# Altium PCB Motor Controller.PcbDoc (part 1 of 2)
Units mil, origin at the board's own origin, x right, y up, seen from the top; angles counter-clockwise.
Board outline 2165.35 x 2283.46 mil, 2 copper layers (Top Layer, Bottom Layer); 50 components, 51 nets, 203 pads, 72 vias.
Unrouted connection lines stored in the file: 35.
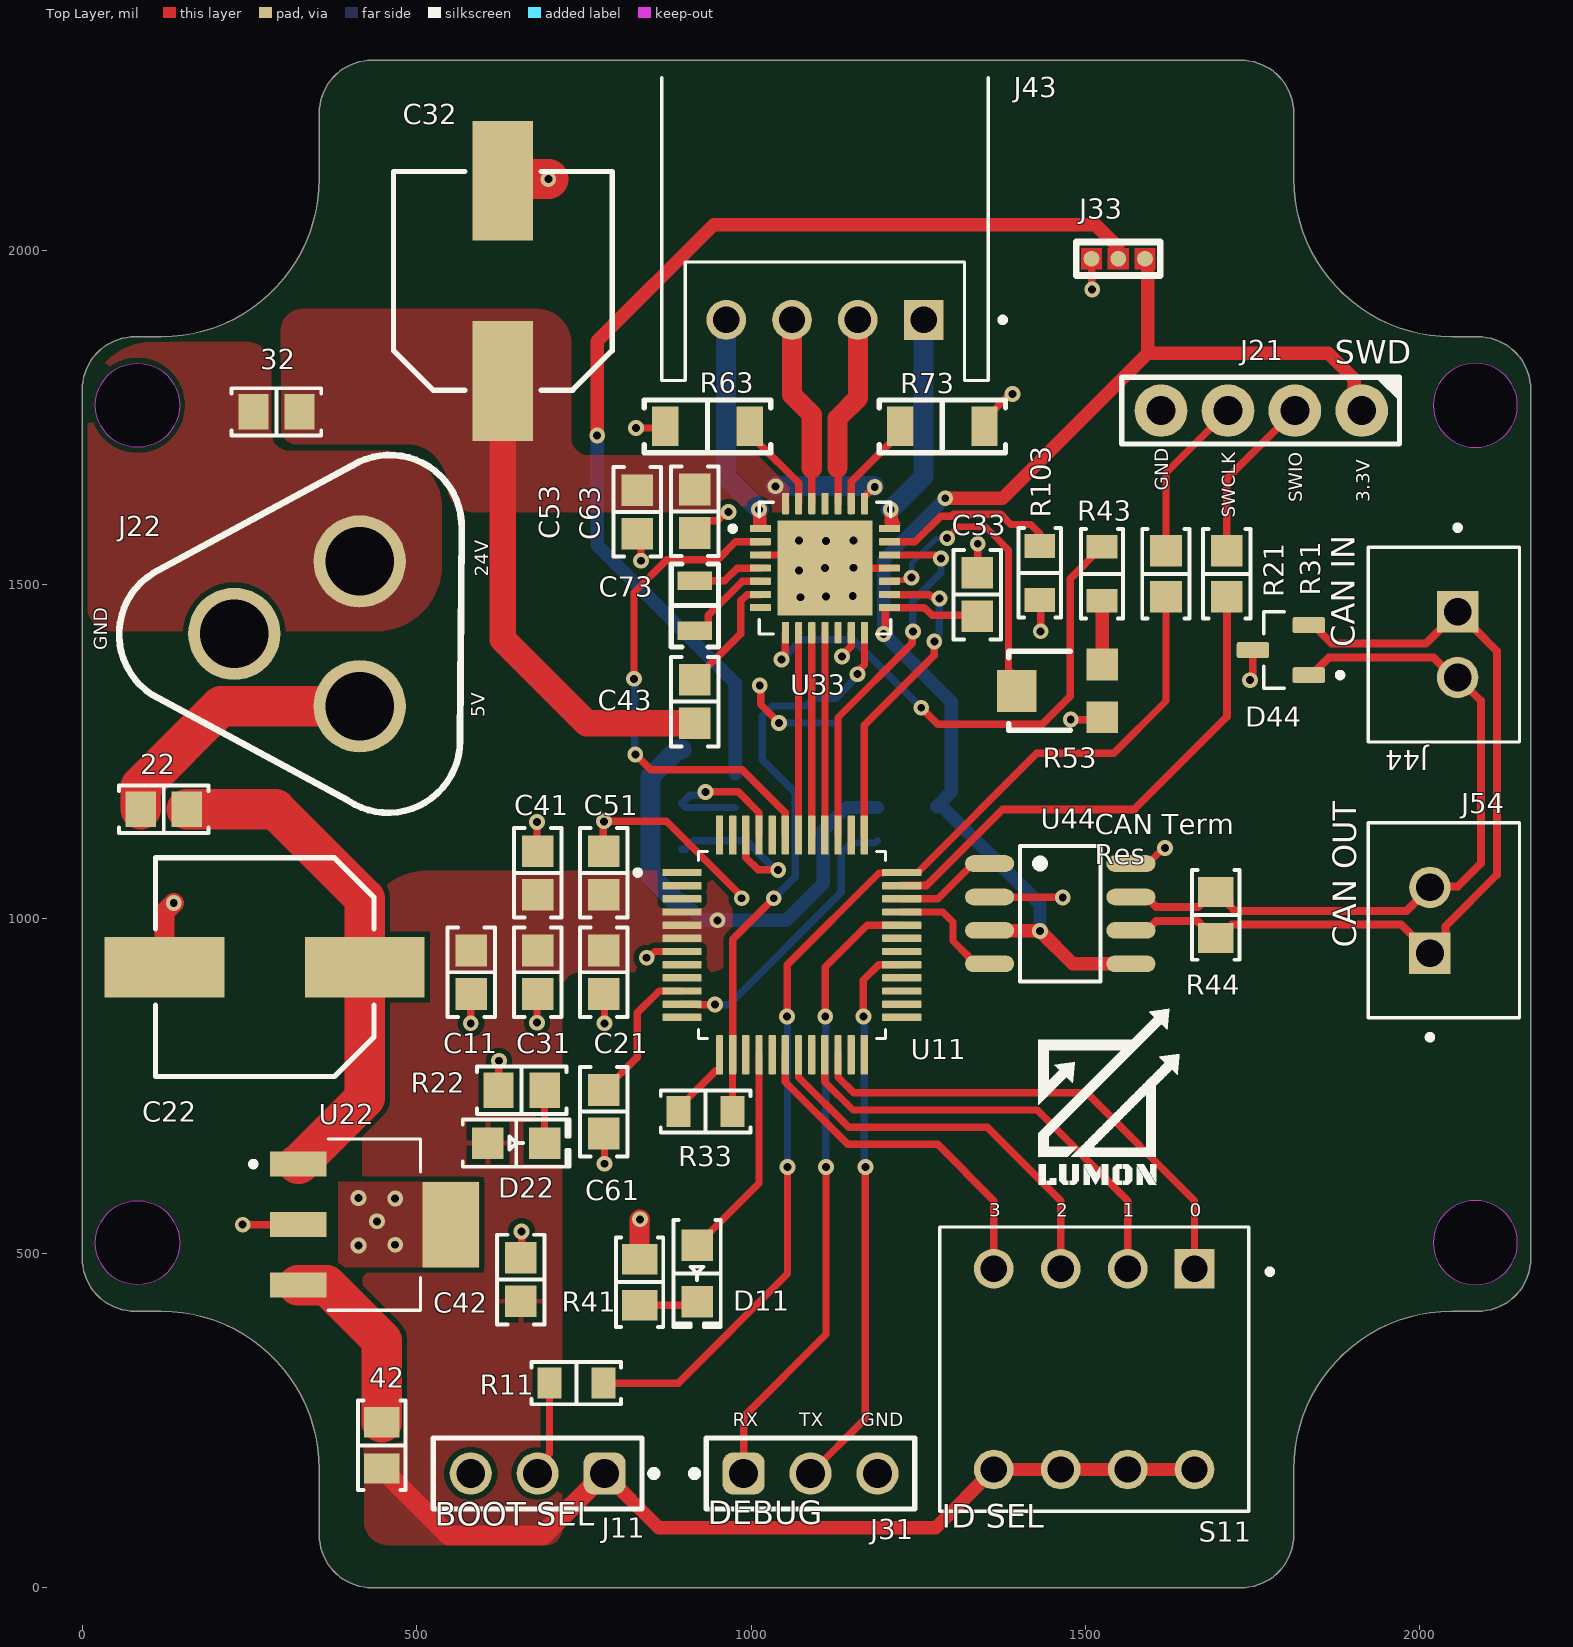
[diagram p0: Top Layer view]
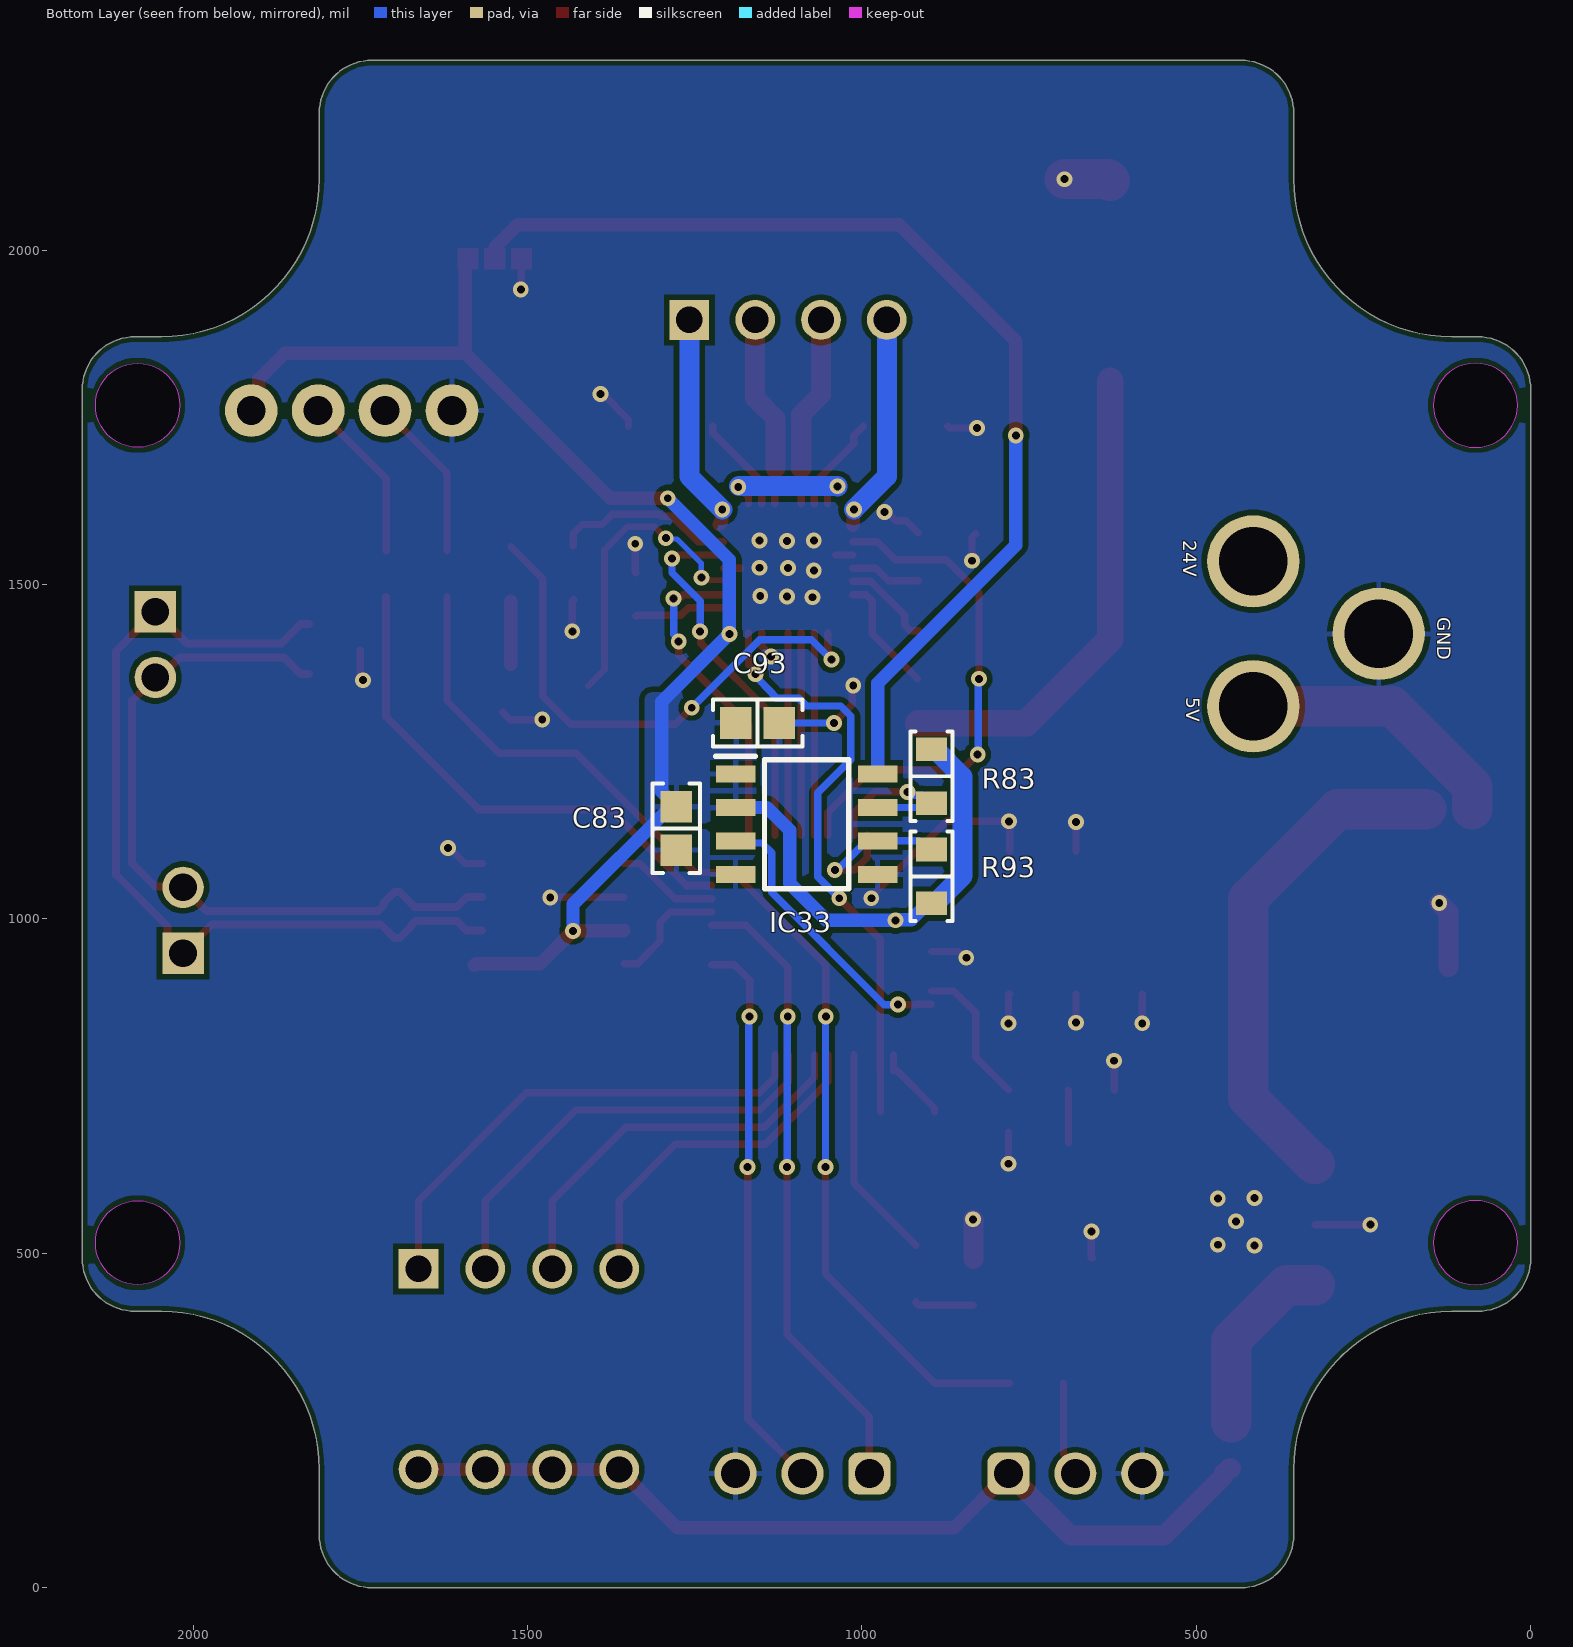
[diagram p1: Bottom Layer view, seen from below]
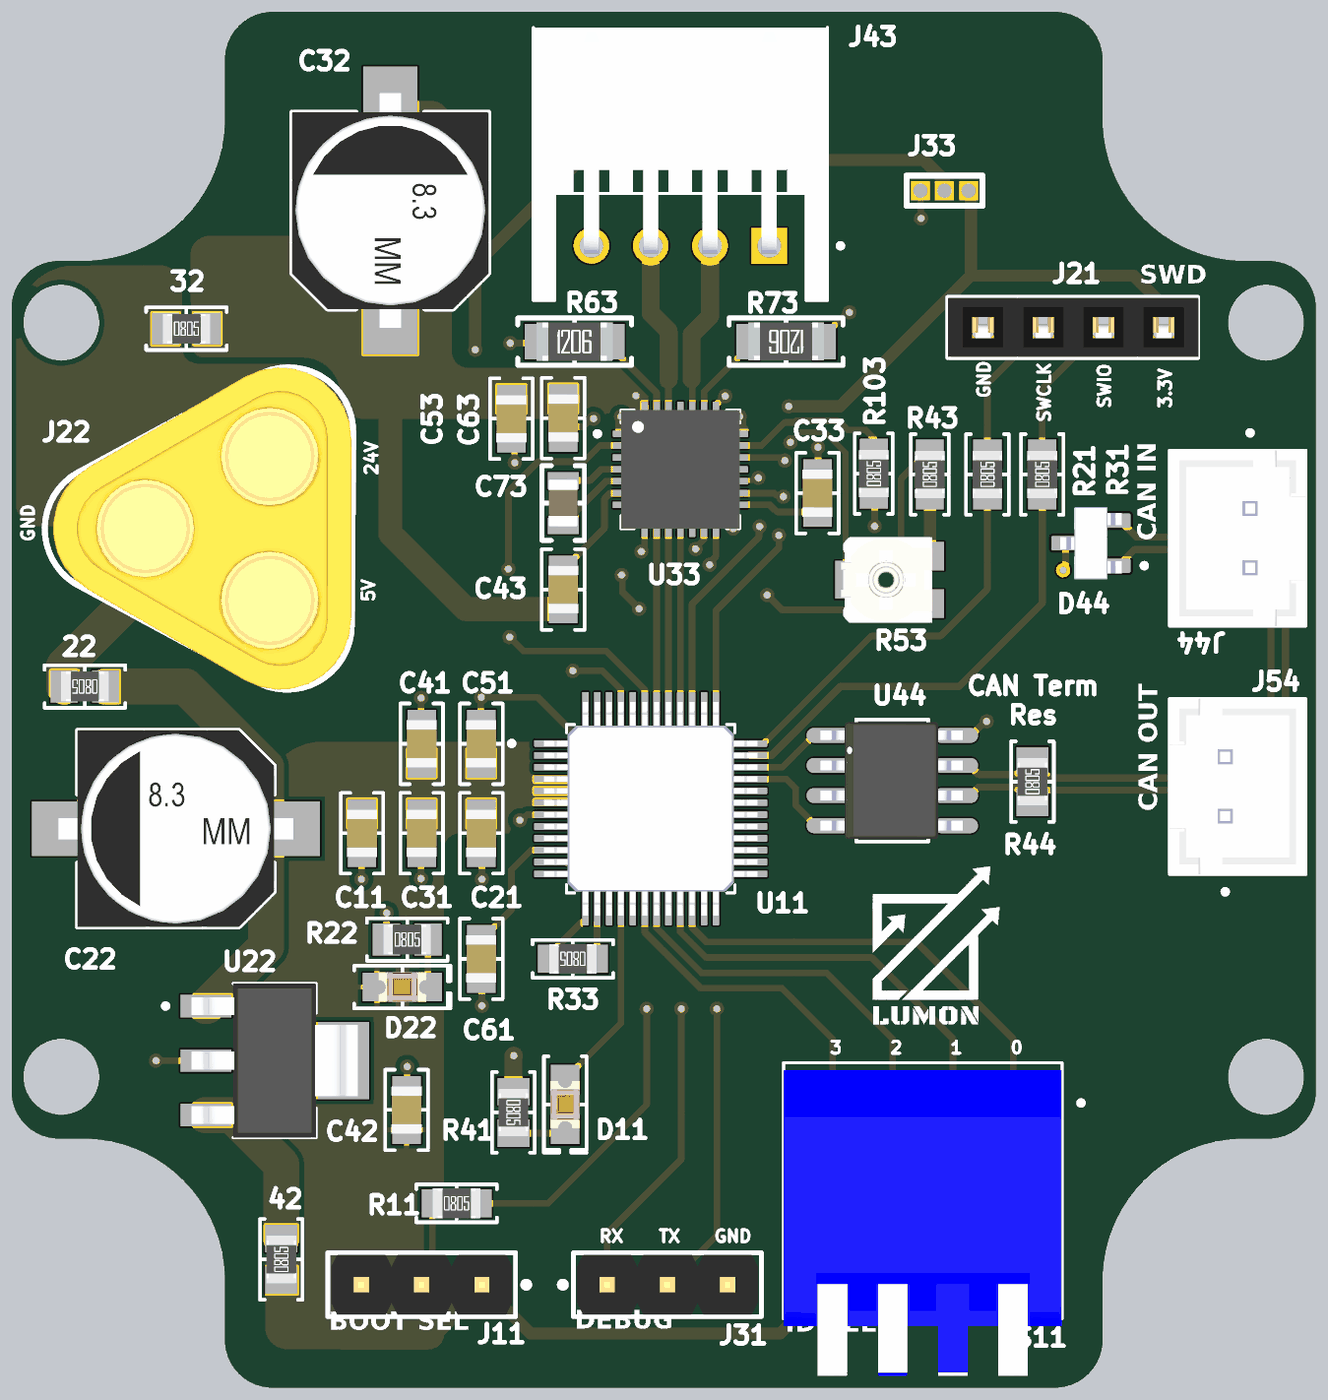
[diagram p2: 3D render of the assembled board from above, using the file's embedded part models]
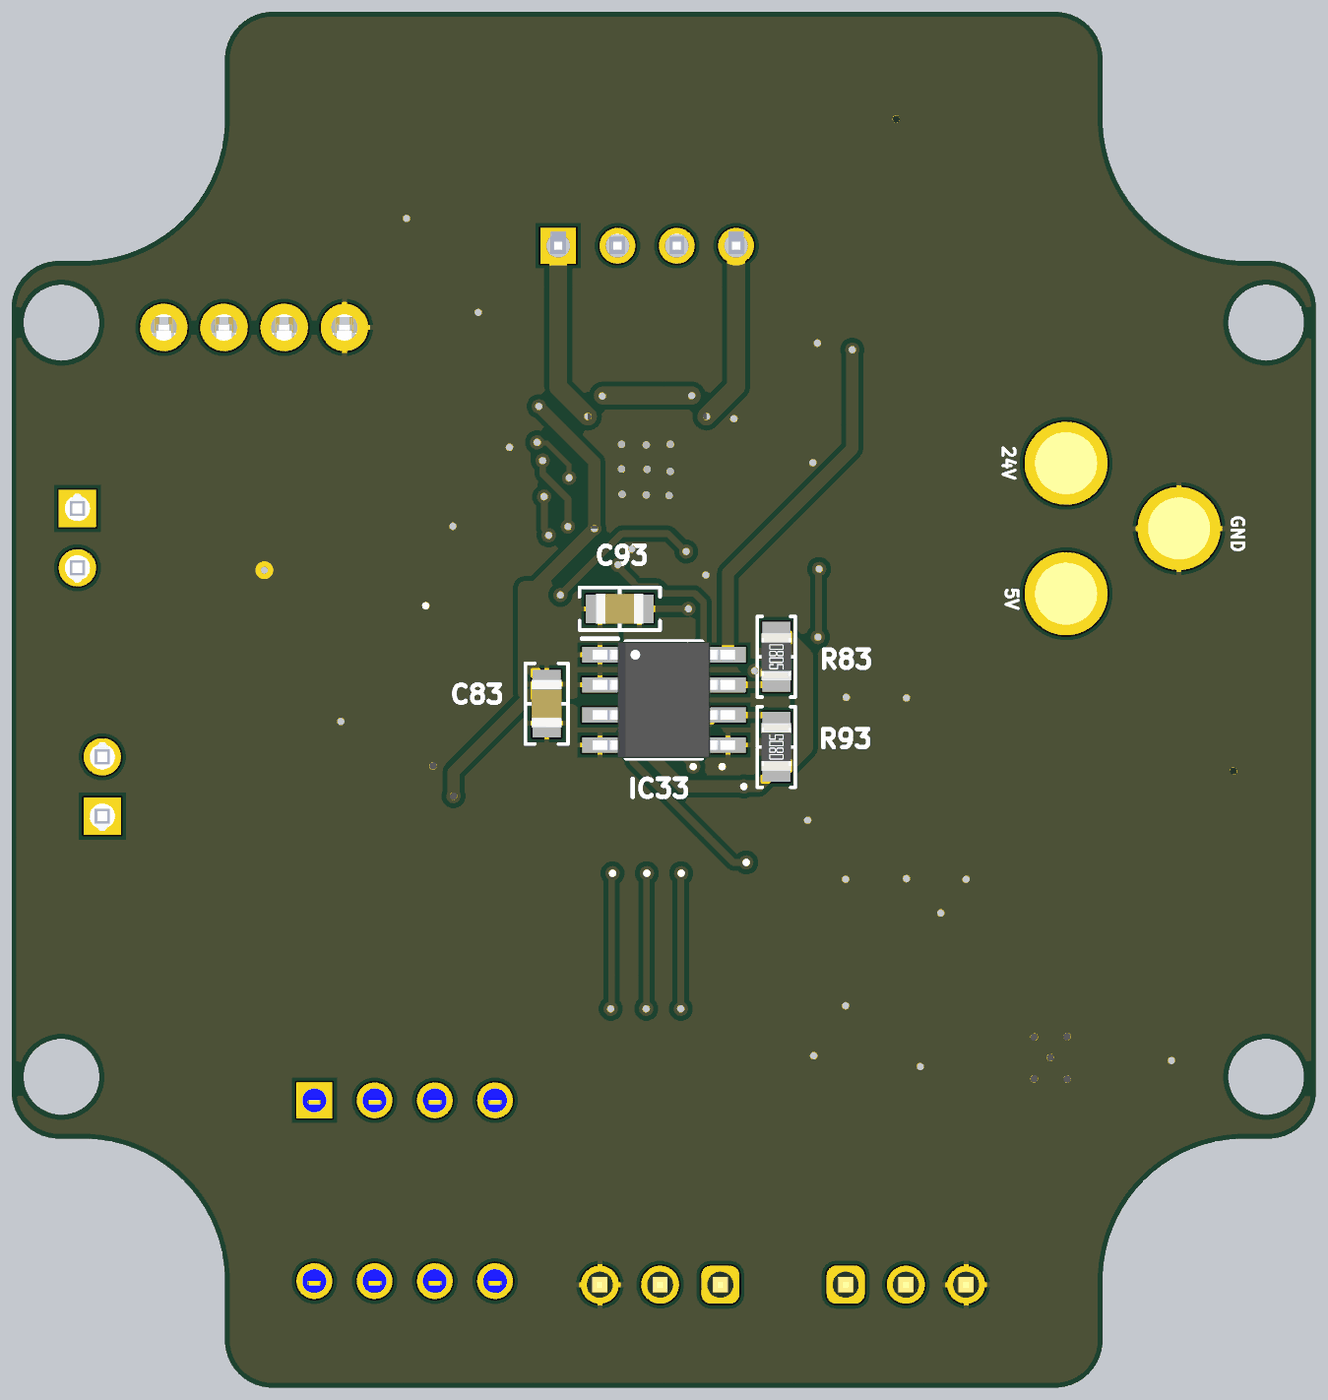
[diagram p3: 3D render of the assembled board from below, using the file's embedded part models]

## Layer stack, top to bottom
Top Solder: solder mask 0.4, Solder Resist, Dk 3.5
Top Layer: signal copper 1.4
Dielectric 1: dielectric 12.6, FR-4, Dk 4.8
Bottom Layer: signal copper 1.4
Bottom Solder: solder mask 0.4, Solder Resist, Dk 3.5

## Board outline
354.58,78.99 354.58,177.42 ccw(c118.36,177.42) 118.36,413.64 78.99,413.64 cw(c78.99,492.38) 0.25,492.38 0.25,1791.59 cw(c78.99,1791.59) 78.99,1870.33 118.36,1870.33 ccw(c118.36,2106.55) 354.58,2106.55 354.58,2204.97 cw(c433.32,2204.97) 433.32,2283.71 1732.53,2283.71 cw(c1732.53,2204.97) 1811.27,2204.97 1811.27,2106.55 ccw(c2047.49,2106.55) 2047.49,1870.33 2086.86,1870.33 cw(c2086.86,1791.59) 2165.6,1791.59 2165.6,492.38 cw(c2086.86,492.38) 2086.86,413.64 2047.49,413.64 ccw(c2047.49,177.42) 1811.27,177.42 1811.27,78.99 cw(c1732.53,78.99) 1732.53,0.25 433.32,0.25 cw(c433.32,78.99)
cut-out: 2019.81,1767.97 ccw(c2082.8,1767.97) 2082.8,1704.97 ccw(c2082.8,1767.97) 2145.79,1767.97 ccw(c2082.8,1767.97) 2082.8,1830.96 ccw(c2082.8,1767.97)
cut-out: 2019.81,516 ccw(c2082.8,516) 2082.8,453.01 ccw(c2082.8,516) 2145.79,516 ccw(c2082.8,516) 2082.8,578.99 ccw(c2082.8,516)
cut-out: 82.8,1704.97 cw(c82.8,1767.97) 19.81,1767.97 cw(c82.8,1767.97) 82.8,1830.96 cw(c82.8,1767.97) 145.79,1767.97 cw(c82.8,1767.97)
cut-out: 82.8,453.01 cw(c82.8,516) 19.81,516 cw(c82.8,516) 82.8,578.99 cw(c82.8,516) 145.79,516 cw(c82.8,516)

## Design rules (kind name [scope] priority, off if disabled: settings)
BoardOutlineClearance [All] p1: gap=7.87 ignorepadtopadclearanceinfootprint=FALSE
Clearance [All] p1: gap=8 ignorepadtopadclearanceinfootprint=FALSE except(9.84: Arc-Hole Track-Hole SMDPad-Hole THPad-Hole Via-Hole Fill-Hole Poly-Hole Region-Hole Text-Hole)
ComponentClearance [All] p1: gap=5 collisioncheckmode=3 verticalgap=5 showdistances=TRUE
DiffPairsRouting [InDifferentialPair('CAN')] p1: maxlimit=8 minlimit=7.9 mostfreqgap=8 toplayer_minwidth=11.9 toplayer_maxwidth=12.1 toplayer_prefwidth=12 bottomlayer_minwidth=11.9 bottomlayer_maxwidth=12.1 bottomlayer_prefwidth=12 maxuncoupledlength=500
Height [All] p1: minheight=0 maxheight=71497.94 prefheight=500
HoleSize [All] p1: absolutevalues=TRUE maxlimit=248.03 minlimit=11.81 maxpercent=80.000 minpercent=20.000
HoleToHoleClearance [All] p1: gap=9.84 allowstackedmicrovias=FALSE
MinimumAnnularRing [All] p1: minimumring=3
MinimumSolderMaskSliver [All] p1: minsoldermaskwidth=0
PlaneClearance [All] p1: clearance=8
PlaneConnect PlaneConnectPowerPads [InPadClass('PowerPads')] p1: planeconnectstyle=Direct reliefexpansion=20 reliefentries=4 reliefconductorwidth=10 reliefairgap=10
PlaneConnect [All] p2: pad.planeconnectstyle=Relief pad.reliefexpansion=11.81 pad.reliefentries=4 pad.reliefconductorwidth=8 pad.reliefairgap=8 via.planeconnectstyle=Direct via.reliefexpansion=11.81 via.reliefentries=4 via.reliefconductorwidth=5 via.reliefairgap=5
PolygonConnect PolygonConnectPowerPads [All vs (InPadClass('PowerPads'))] p1: connectstyle=Direct reliefconductorwidth=10 reliefentries=4 polygonreliefangle="90 Angle" airgapwidth=10
PolygonConnect [All] p2: thpad.connectstyle=Relief thpad.reliefconductorwidth=8 thpad.reliefentries=4 thpad.polygonreliefangle="90 Angle" thpad.airgapwidth=8 smdpad.connectstyle=Relief smdpad.reliefconductorwidth=8 smdpad.reliefentries=4 smdpad.polygonreliefangle="90 Angle" smdpad.airgapwidth=8 via.connectstyle=Direct via.reliefconductorwidth=5 via.reliefentries=4 via.polygonreliefangle="90 Angle" via.airgapwidth=5
RoutingVias [All] p1: holewidth=11.81 width=23.62 viastyle="Through Hole" minholewidth=11.81 minwidth=23.62 maxholewidth=23.62 maxwidth=259.84
SilkToSilkClearance [All] p1: silktosilkclearance=0
SilkToSolderMaskClearance [IsPad] p1: minsilkscreentomaskgap=5 clearancetoexposedcopper=TRUE
SolderMaskExpansion [All] p1: expansion=2.95 istentingtop=FALSE
SupplyNets "Schematic Supply Nets_1" [InNet('GND')] p1: voltage=0.000
SupplyNets "Schematic Supply Nets" [InNet('+5')] p2: voltage=0.000
Width [All] p1: maxlimit=1000 minlimit=8 preferedwidth=20 minimp=50.000000 maximp=50.000000 favimp=50.000000
20 further rules are at their usual default settings.

## Classes and differential pairs
component class Power: 22 32 42 C22 C32 C42 D22 J22 R22 U22
component class "Motor driver": C33 C43 C53 C63 C73 C83 C93 IC33 J33 J43 R33 R43 R53 R63 R73 R83 R93 R103 U33
component class MCU: C11 C21 C31 C41 C51 C61 D11 J11 J21 J31 R11 R21 R31 R41 S11 U11
component class "CAN transciver": D44 J44 J54 R44 U44
differential pair CAN: +CAN_P -CAN_N

## Components (designator, comment, footprint, x,y, rotation, side; value= is the part's Value field where it differs from the comment)
22 "0 Ohms" "RES 0805_2012"#1 122,1164 r180 top
32 "0 Ohms" "RES 0805_2012"#1 290.55,1758 r0 top
42 "0 Ohms" "RES 0805_2012"#1 448,213 r90 top
C11 "10 µF" "CAP 0805_2012" 582,920.34 r270 top
C21 "0.1 µF" "CAP 0805_2012" 780,920.34 r270 top
C22 "100 µF" "CAP ALSMD 8.3MM H10.5MM" 273,928 r180 top locked
C31 "0.1 µF" "CAP 0805_2012" 681,920.34 r270 top
C32 "100 µF" "CAP ALSMD 8.3MM H10.5MM" 629,1954 r90 top locked
C33 "0.1 µF" "CAP 0805_2012" 1338,1485 r90 top
C41 "1 µF" "CAP 0805_2012" 681,1068.84 r90 top
C42 "10 µF" "CAP 0805_2012" 656,461 r270 top
C43 "0.1 µF" "CAP 0805_2012" 916,1325 r90 top
C51 "10000 pF" "CAP 0805_2012" 780,1068.84 r90 top
C53 "0.1 µF" "CAP 0805_2012" 830,1608.5 r90 top
C61 "0.1 µF" "CAP 0805_2012" 780,711.84 r270 top
C63 "0.1 µF" "CAP 0805_2012" 916,1609.5 r90 top
C73 "0.022 µF" "MURATA GRM21B 0805_2012" 916,1468.5 r90 top
C83 "0.1 µF" "CAP 0805_2012" 1277.39,1135.5 r270 bottom
C93 "10 µF" "CAP 0805_2012" 1156,1293 r0 bottom
D11 "Red" "LED 0805_2012 RED" 919.32,470.07 r270 top
D22 "Red" "LED 0805_2012 RED" 649,665 r0 top
D44 "NUP2105L" SOT95P240X120-3N 1792,1402 r180 top
IC33 "AS5600-ASOT" SOIC127P600X175-8N 1082.68,1141.73 r180 bottom
J11 "61300311121" "WURTH WE-PHD 61300311121" 681,171 r180 top
J21 "M20-7820442" "HARWIN M20-7820445" 1763,1760 r270 top
J22 "MT-60" MT-60 360,1426.27 r90 top locked
J31 "61300311121" "WURTH WE-PHD 61300311121" 1089,171 r0 top
J33 "Solder_Bridge" SOLDER_BRIDGE 1549,1987 r180 top
J43 "S4B-XH-A" JST_S4B-XH-A 1110.5,2120 r180 top locked
J44 "B2B-XH-A_(LF)(SN)" JST_B2B-XH-A_(LF)(SN) 2035.67,1410.21 r90 top locked
J54 "B2B-XH-A_(LF)(SN)" JST_B2B-XH-A_(LF)(SN) 2035.67,998 r270 top locked
R11 "10 kOhms" "YAGEO RES 0805_2012" 739,306 r0 top
R21 "33 Ohms" "RES 0805_2012"#2 1620.32,1516 r90 top
R22 "470 Ohms" "RES 0805_2012"#1 657,744 r0 top
R31 "33 Ohms" "RES 0805_2012"#2 1711.32,1516 r90 top
R33 "1 kOhms" "YAGEO RES 0805_2012" 932,712 r180 top
R41 "470 Ohms" "RES 0805_2012"#1 833.32,457 r270 top
R43 "10 kOhms" "YAGEO RES 0805_2012" 1524.63,1516 r90 top
R44 "120 Ohms" "RES 0805_2012"#1 1695,1006 r90 top
R53 "10 kOhms" "POT BOURNS TRIMPOT TC33" 1454,1341 r90 top
R63 "120 mOhms" "YAGEO RES 1206_3216" 935,1736.5 r0 top locked
R73 "120 mOhms" "YAGEO RES 1206_3216" 1286,1736.5 r180 top locked
R83 "4.7 kOhms" "YAGEO RES 0805_2012" 896,1213.34 r270 bottom
R93 "4.7 kOhms" "YAGEO RES 0805_2012" 896,1063.66 r90 bottom
R103 "100 kOhms" "YAGEO RES 0805_2012" 1431.63,1517.34 r90 top
S11 "DS02C-254-1L-04BE" SW_DS02C-254-1L-04BE 1513,327 r180 top locked
U11 "STM32G0B1CBT6" QFP50P900X900X160-48N 1061.17,961.18 r0 top locked
U22 "TL1963A-33DCYR" VREG_TL1963A-33DCYR 437,543 r0 top
U33 "TMC2209-LA-T" QFN50P500X500X90-29N 1110.5,1524.5 r0 top locked
U44 "TCAN3413DR1" TCAN3413DR1 1460,1009 r270 top locked

## Footprints (in the part's own frame and the unit in brackets; to place one, negate y for a bottom-side part, rotate by r counter-clockwise, add the part's x,y. Pads: shape width x height; smd on the part's side, far side on the other; paste and mask are expansions set on the pad)
"CAP 0805_2012" [mm] "Chip Capacitor, 2-Leads, Body 2.00x1.20mm, IPC Medium Density"
  rect 1.2x1.2 smd: 1(-0.825,0) 2(0.825,0)
  silkscreen extent -1.7,-0.9 1.7,0.9, body extent -1,-0.64 1,0.64, height 1.26
"CAP ALSMD 8.3MM H10.5MM" [mm] "Aluminum Electrolytic Capacitor, Body 8.30x8.30x10.50mm, IPC Low Density"
  rect 4.55x2.3 smd: 1(-3.8,0) 2(3.8,0)
  silkscreen extent -4.15,-4.15 4.15,4.15, body extent -4.95,-4.15 4.95,4.15, height 10.5
"HARWIN M20-7820445" [mm] "2.54mm DIL PC TAIL PIN HEADER ASSEMBLY"
  round 2 hole 1.1: 1(0,3.81) 2(0,1.27) 3(0,-1.27) 4(0,-3.81)
  silkscreen extent -1.27,-5.3 1.27,5.27, body extent -1.25,-5.28 1.25,5.28, height 8.5
JST_B2B-XH-A_(LF)(SN) [mm]
  rect 1.575x1.575 / inner round 1.575 / far side rect 1.575x1.575 hole 1.05: 1(1.25,-0.525)
  round 1.575 hole 1.05: 2(-1.25,-0.525)
  silkscreen extent -3.7,-2.88 4.54,2.88, body extent -3.7,-2.88 3.7,2.88, height 7
JST_S4B-XH-A [mm]
  rect 1.508x1.508 / inner round 1.508 / far side rect 1.508x1.508 hole 1: 1(-3.75,5.7)
  round 1.508 hole 1: 2(-1.25,5.7) 3(1.25,5.7) 4(3.75,5.7)
  silkscreen extent -6.85,-3.5 6.2,8, body extent -6.2,-3.5 6.2,8, height 6.1
"LED 0805_2012 RED" [mm] "Chip Diode, 2-Leads, Body 2.00x1.25mm, IPC Medium Density"
  rect 1.2x1.2 smd: 1(-1.075,0) 2(1.075,0)
  silkscreen extent -2.03,-0.9 2.03,0.9, body extent -1,-0.62 1,0.63, height 0.9
MT-60 [mm]
  round 3.5 hole 2.605: 1(-2.75,-1.397) 2(0,3.366) 3(2.75,-1.397)
  silkscreen extent -6.79,-5.27 6.79,7.74, body extent -6.8,-5.2 6.8,7.39, height 15
"MURATA GRM21B 0805_2012" [mm] "Chip Capacitor, 2-Leads, Body 2.00x1.25mm"
  rect 0.7x1.3 smd: 1(-0.95,0) 2(0.95,0)
  silkscreen extent -1.58,-0.9 1.58,0.9, body extent -1,-0.63 1,0.63, height 1.25
"POT BOURNS TRIMPOT TC33" [mm] "Bourns Trimpot TC33X-1 - Open Frame 3mm x 3.8mm x 1.2mm"
  rect 1.2x1.2 smd: 1(-1,-1.8) 3(1,-1.8)
  rect 1.6x1.5 smd: 2(0,1.45)
  silkscreen extent -1.5,-0.6 1.5,1.75, body extent -1.8,-1.91 1.8,1.95, height 1.15
QFN50P500X500X90-29N [mm]
  rrect25% 0.81x0.27 smd: 1(-2.45,1.5) 2(-2.45,1) 3(-2.45,0.5) 4(-2.45,0) 5(-2.45,-0.5) 6(-2.45,-1) 7(-2.45,-1.5) 15(2.45,-1.5) 16(2.45,-1) 17(2.45,-0.5) 18(2.45,0) 19(2.45,0.5) 20(2.45,1) 21(2.45,1.5)
  rrect25% 0.27x0.81 smd: 8(-1.5,-2.45) 9(-1,-2.45) 10(-0.5,-2.45) 11(0,-2.45) 12(0.5,-2.45) 13(1,-2.45) 14(1.5,-2.45) 22(1.5,2.45) 23(1,2.45) 24(0.5,2.45) 25(0,2.45) 26(-0.5,2.45) 27(-1,2.45) 28(-1.5,2.45)
  rect 3.6x3.6 smd: 29(0,0)
  silkscreen extent -3.6,-2.5 2.5,2.5, body extent -2.5,-2.5 2.5,2.5, height 0.9
QFP50P900X900X160-48N [mm]
  rrect25% 1.49x0.28 smd: 1(-4.17,2.75) 2(-4.17,2.25) 3(-4.17,1.75) 4(-4.17,1.25) 5(-4.17,0.75) 6(-4.17,0.25) 7(-4.17,-0.25) 8(-4.17,-0.75) 9(-4.17,-1.25) 10(-4.17,-1.75) 11(-4.17,-2.25) 12(-4.17,-2.75) 25(4.17,-2.75) 26(4.17,-2.25) 27(4.17,-1.75) 28(4.17,-1.25) 29(4.17,-0.75) 30(4.17,-0.25) 31(4.17,0.25) 32(4.17,0.75) 33(4.17,1.25) 34(4.17,1.75) 35(4.17,2.25) 36(4.17,2.75)
  rrect25% 0.28x1.49 smd: 13(-2.75,-4.17) 14(-2.25,-4.17) 15(-1.75,-4.17) 16(-1.25,-4.17) 17(-0.75,-4.17) 18(-0.25,-4.17) 19(0.25,-4.17) 20(0.75,-4.17) 21(1.25,-4.17) 22(1.75,-4.17) 23(2.25,-4.17) 24(2.75,-4.17) 37(2.75,4.17) 38(2.25,4.17) 39(1.75,4.17) 40(1.25,4.17) 41(0.75,4.17) 42(0.25,4.17) 43(-0.25,4.17) 44(-0.75,4.17) 45(-1.25,4.17) 46(-1.75,4.17) 47(-2.25,4.17) 48(-2.75,4.17)
  silkscreen extent -5.96,-3.55 3.55,3.55, body extent -4.5,-4.5 4.5,4.5, height 1.61
"RES 0805_2012"#1 [mm] "Chip Resistor, 2-Leads, Body 2.00x1.25mm, IPC Medium Density"
  rect 1.15x1.35 smd: 1(-0.875,0) 2(0.875,0)
  silkscreen extent -1.7,-0.9 1.7,0.9, body extent -1,-0.62 1,0.63, height 0.6
"RES 0805_2012"#2 [mm] "Chip Resistor, 2-Leads, Body 2.00x1.25mm, IPC Medium Density"
  rect 1.2x1.2 smd: 1(-0.875,0) 2(0.875,0)
  silkscreen extent -1.7,-0.9 1.7,0.9, body extent -1,-0.62 1,0.63, height 0.6
SOIC127P600X175-8N [mm]
  rect 1.5x0.65 smd: 1(-2.7,1.905) 2(-2.7,0.635) 3(-2.7,-0.635) 4(-2.7,-1.905) 5(2.7,-1.905) 6(2.7,-0.635) 7(2.7,0.635) 8(2.7,1.905)
  silkscreen extent -3.45,-2.45 1.6,2.58, body extent -3,-2.45 3,2.45, height 1.75
SOLDER_BRIDGE [mm]
  round 0.6 smd: 1(-1.016,0) 2(1.016,0) 3(0,0)
  Top Layer region: 0.616,-0.4 1.416,-0.4 1.416,0.4 0.616,0.4
  Top Layer region: -1.416,-0.4 -0.616,-0.4 -0.616,0.4 -1.416,0.4
  Top Layer region: -0.406,-0.406 0.406,-0.406 0.406,0.406 -0.406,0.406
  silkscreen extent -1.6,-0.64 1.6,0.64
SOT95P240X120-3N [mm]
  rrect25% 1.23x0.6 smd paste+0 mask+0.102: 1(-1.06,0.95) 2(-1.06,-0.95) 3(1.06,0)
  silkscreen extent -2.35,-1.45 0.65,1.45, body extent -1.3,-1.52 1.3,1.52, height 1.3
SW_DS02C-254-1L-04BE [mm]
  rect 1.508x1.508 / inner round 1.508 / far side rect 1.508x1.508 hole 1: 1A(-3.81,-3.81)
  round 1.508 hole 1: 1B(-3.81,3.81) 2A(-1.27,-3.81) 2B(-1.27,3.81) 3A(1.27,-3.81) 3B(1.27,3.81) 4A(3.81,-3.81) 4B(3.81,3.81)
  silkscreen extent -6.77,-5.4 5.87,5.4, body extent -5.86,-5.08 5.86,7.8, height 9.46
TCAN3413DR1 [mm]
  oval 0.63x1.865 smd: 1(-1.877,-2.624) 2(-0.607,-2.624) 3(0.663,-2.624) 4(1.933,-2.624) 5(1.933,2.741) 6(0.663,2.741) 7(-0.607,2.741) 8(-1.877,2.741)
  silkscreen extent -2.55,-1.46 2.6,1.58, body extent -2.44,-2.97 2.49,3.02, height 1.73
VREG_TL1963A-33DCYR [mm]
  rect 2.15x0.95 smd: 1(-2.9,2.3) 2(-2.9,0) 3(-2.9,-2.3)
  rect 2.15x3.25 smd: 4(2.9,0)
  silkscreen extent -4.7,-3.25 1.75,3.25, body extent -3.5,-3.25 3.5,3.25, height 1.8
"WURTH WE-PHD 61300311121" [mm] "Pin Header, pitch 2.54 mm, THT, Vertical, single row, 3p"
  rrect50% 1.6x1.6 hole 1.1: 1(-2.54,0)
  round 1.6 hole 1.1: 2(0,0) 3(2.54,0)
  silkscreen extent -4.53,-1.35 3.96,1.35, body extent -3.81,-1.27 3.81,1.27, height 8.57
"YAGEO RES 0805_2012" [mm] "Chip Resistor, 2-Leads, Body 2.00x1.25mm"
  rect 0.9x1.175 smd: 1(-1.025,0) 2(1.025,0)
  silkscreen extent -1.7,-0.8 1.7,0.8, body extent -1,-0.62 1,0.63, height 0.6
"YAGEO RES 1206_3216" [mm] "Chip Resistor, 2-Leads, Body 3.13x1.55mm"
  rect 1x1.5 smd: 1(-1.6,0) 2(1.6,0)
  silkscreen extent -2.4,-1 2.4,1, body extent -1.6,-0.8 1.6,0.8, height 0.6

## Part data
22 32 42: library part JR0805X35E, "0805 35 AMP JUMPER", Device Package="0805 (2012 Metric)", Manufacturer=Ohmite, Operating Temperature="-55°C ~ 150°C", Power (Watts)=0.245W, Supplier Device Package=0805, Supplier Part Number 1=273-JR0805X35ECT-ND, Tolerance=Jumper, componentlink1description=Datasheet, componentlink1url=https://www.ohmite.com/assets/docs/res_jr.pdf?r=false, ComponentLink2Description="DigiKey Link", ComponentLink2URL=https://www.digikey.com/en/products/detail/ohmite/JR0805X35E/10233372, Composition="Metal Element", Height - Seated (Max)="0.022\" (0.55mm)", lastupdated="2026-04-05 8:11:19 PM", Lifecycle Status=Active, Minimum Order=1, Number of Terminations=2, Package / Case="0805 (2012 Metric)", Packaging=TapeAndReel, Part Number=JR0805X35E, Part Status=Active, partid=29311, price=0.08, Resistance="0 Ohms", Series=JR, Size / Dimension="0.079\" L x 0.049\" W (2.00mm x 1.25mm)", Supplier 1=DigiKey
C11 C42 C93: library part CL21B106KPQNNNE, "CAP CER 10UF 10V X7R 0805", Device Package="0805 (2012 Metric)", LCSC part #=C32635, Manufacturer="Samsung Electro-Mechanics", Operating Temperature="-55°C ~ 125°C", Supplier Part Number 1=1276-1764-1-ND, Temperature Coefficient=X7R, Tolerance=±10%, Voltage - Rated=10V, Applications="General Purpose", Capacitance="10 µF", componentlink1description=Datasheet, componentlink1url=http://www.samsungsem.com/kr/support/product-search/mlcc/CL21B106KPQNNNE.jsp, ComponentLink2Description="DigiKey Link", ComponentLink2URL=https://www.digikey.com/en/products/detail/samsung-electro-mechanics/CL21B106KPQNNNE/3887422, lastupdated="2024-02-09 8:15:41 PM", LCSC link=https://www.lcsc.com/product-detail/C32635.html, Lifecycle Status=Active, Minimum Order=1, Mounting Type="Surface Mount, MLCC", Package / Case="0805 (2012 Metric)", Packaging=TapeAndReel, Part Number=CL21B106KPQNNNE, Part Status=Active, partid=13130, price=0.02, Series=CL, Size / Dimension="0.079\" L x 0.049\" W (2.00mm x 1.25mm)", Supplier 1=DigiKey, Thickness (Max)="0.055\" (1.40mm)"
C21 C31 C33 C43 C53 C61 C63 C83: library part CC0805KRX7R9BB104, "CAP CER 0.1UF 50V X7R 0805", Device Package="0805 (2012 Metric)", LCSC part #=C49678, Manufacturer=Yageo, Operating Temperature="-55°C ~ 125°C", Supplier Part Number 1=311-1140-1-ND, Temperature Coefficient=X7R, Tolerance=±10%, Voltage - Rated=50V, Applications="General Purpose", Capacitance="0.1 µF", componentlink1description=Datasheet, componentlink1url=https://www.yageo.com/upload/media/product/productsearch/datasheet/mlcc/UPY-GPHC_X7R_6.3V-to-50V_18.pdf, ComponentLink2Description="DigiKey Link", ComponentLink2URL=https://www.digikey.com/en/products/detail/yageo/CC0805KRX7R9BB104/302874, Features="High Voltage", lastupdated="2024-02-09 8:15:42 PM", LCSC link=https://www.lcsc.com/product-detail/C49678.html, Lifecycle Status=Active, Minimum Order=1, Mounting Type="Surface Mount, MLCC", Package / Case="0805 (2012 Metric)", Packaging=TapeAndReel, Part Number=CC0805KRX7R9BB104, Part Status=Active, partid=12715, price=0.01, Series=CC, Size / Dimension="0.079\" L x 0.049\" W (2.00mm x 1.25mm)", Supplier 1=DigiKey, Thickness (Max)="0.033\" (0.85mm)"
C22 C32: library part 50SKV100M8X10.5, "CAP ALUM 100UF 20% 50V SMD", Device Package="Radial, Can - SMD", LCSC part #=C2983550, Lifetime @ Temp.="1000 Hrs @ 105°C", Manufacturer=Rubycon, Operating Temperature="-55°C ~ 105°C", Ripple Current @ High Frequency="240 mA @ 10 kHz", Ripple Current @ Low Frequency="200 mA @ 120 Hz", Supplier Part Number 1=1189-3108-1-ND, Tolerance=±20%, Voltage - Rated="50 V", Applications="General Purpose", Capacitance="100 µF", componentlink1description=Datasheet, componentlink1url=http://www.rubycon.co.jp/en/catalog/e_pdfs/aluminum/e_SKV.pdf, ComponentLink2Description="DigiKey Link", ComponentLink2URL=https://www.digikey.com/en/products/detail/rubycon/50SKV100M8X10-5/3568726, Height - Seated (Max)="0.413\" (10.50mm)", lastupdated="2026-04-05 8:53:56 PM", Lifecycle Status=Active, Minimum Order=1, Mounting Type="Surface Mount", Package / Case="Radial, Can - SMD", Packaging=TapeAndReel, Part Number=50SKV100M8X10.5, Part Status=Active, partid=7600, Polarization=Polar, price=0.17, Series=SKV, Size / Dimension="0.315\" Dia (8.00mm)", Supplier 1=DigiKey, Surface Mount Land Size="0.327\" L x 0.327\" W (8.30mm x 8.30mm)"
C41: library part CL21B105KOFNNNE, "CAP CER 1UF 16V X7R 0805", Device Package="0805 (2012 Metric)", LCSC part #=C24123, Manufacturer="Samsung Electro-Mechanics", Operating Temperature="-55°C ~ 125°C", Supplier Part Number 1=1276-1026-1-ND, Temperature Coefficient=X7R, Tolerance=±10%, Voltage - Rated=16V, Applications="General Purpose", Capacitance="1 µF", componentlink1description=Datasheet, componentlink1url=http://www.samsungsem.com/kr/support/product-search/mlcc/CL21B105KOFNNNE.jsp, ComponentLink2Description="DigiKey Link", ComponentLink2URL=https://www.digikey.com/en/products/detail/samsung-electro-mechanics/CL21B105KOFNNNE/3886684, lastupdated="2024-02-09 8:15:36 PM", LCSC link=https://www.lcsc.com/product-detail/C24123.html, Lifecycle Status=Active, Minimum Order=1, Mounting Type="Surface Mount, MLCC", Package / Case="0805 (2012 Metric)", Packaging=TapeAndReel, Part Number=CL21B105KOFNNNE, Part Status=Active, partid=14424, price=0.01, Series=CL, Size / Dimension="0.079\" L x 0.049\" W (2.00mm x 1.25mm)", Supplier 1=DigiKey, Thickness (Max)="0.053\" (1.35mm)"
C51: library part CL21B103KBANNNC, "CAP CER 10000PF 50V X7R 0805", Device Package="0805 (2012 Metric)", LCSC part #=C1710, Manufacturer="Samsung Electro-Mechanics", Operating Temperature="-55°C ~ 125°C", Supplier Part Number 1=1276-1015-1-ND, Temperature Coefficient=X7R, Tolerance=±10%, Voltage - Rated=50V, Applications="General Purpose", Capacitance="10000 pF", componentlink1description=Datasheet, componentlink1url=http://www.samsungsem.com/kr/support/product-search/mlcc/CL21B103KBANNNC.jsp, ComponentLink2Description="DigiKey Link", ComponentLink2URL=https://www.digikey.com/en/products/detail/samsung-electro-mechanics/CL21B103KBANNNC/3886673, lastupdated="2024-02-09 8:15:59 PM", LCSC link=https://www.lcsc.com/product-detail/C1710.html, Lifecycle Status=Active, Minimum Order=1, Mounting Type="Surface Mount, MLCC", Package / Case="0805 (2012 Metric)", Packaging=TapeAndReel, Part Number=CL21B103KBANNNC, Part Status=Active, partid=6199, price=0.01, Series=CL, Size / Dimension="0.079\" L x 0.049\" W (2.00mm x 1.25mm)", Supplier 1=DigiKey, Thickness (Max)="0.030\" (0.75mm)"
C73: library part GRM21B5C1H223JA01L, "CAP CER 0.022UF 50V C0G/NP0 0805", Device Package="0805 (2012 Metric)", LCSC part #=C77069, Manufacturer="Murata Electronics", Operating Temperature="-55°C ~ 125°C", Supplier Part Number 1=490-1644-1-ND, Temperature Coefficient="C0G, NP0", Tolerance=±5%, Voltage - Rated=50V, Applications="General Purpose", Capacitance="0.022 µF", componentlink1description=Datasheet, componentlink1url=https://search.murata.co.jp/Ceramy/image/img/A01X/G101/ENG/GRM21B5C1H223JA01-01.pdf, ComponentLink2Description="DigiKey Link", ComponentLink2URL=https://www.digikey.com/en/products/detail/murata-electronics/GRM21B5C1H223JA01L/586677, lastupdated="2024-08-27 9:29:56 AM", Lifecycle Status=Active, Minimum Order=1, Mounting Type="Surface Mount, MLCC", Package / Case="0805 (2012 Metric)", Packaging=TapeAndReel, Part Number=GRM21B5C1H223JA01L, Part Status=Active, partid=7435, price=0.06, Series=GRM, Size / Dimension="0.079\" L x 0.049\" W (2.00mm x 1.25mm)", Supplier 1=DigiKey, Thickness (Max)="0.053\" (1.35mm)"
D11: library part 5990110007F, "LED RED 0805 SMD", Current - Test=20mA, Device Package="0805 (2012 Metric)", LCSC part #=C84260, Lens Color=0.80mm, Manufacturer=Dialight, Millicandela Rating=29mcd, Supplier Device Package=0805, Supplier Part Number 1=350-4353-1-ND, Voltage - Forward (Vf) (Typ)=2.1V, Color=Red, componentlink1description=Datasheet, componentlink1url=http://www.dialightsignalsandcomponents.com/Assets/Brochures_And_Catalogs/Indication/CBI_SMD_new/Dialight_CBI_data_599-0805_Apr2018.pdf, ComponentLink2Description="DigiKey Link", ComponentLink2URL=https://www.digikey.com/en/products/detail/dialight/5990110007F/9385408, Configuration=Standard, Height (Max)=0.80mm, lastupdated="2024-06-03 8:00:07 PM", Lens Size="1.40mm x 1.25mm", Lens Style="Rectangle with Flat Top", Lifecycle Status=Active, Minimum Order=1, Mounting Type="Surface Mount", Package / Case="0805 (2012 Metric)", Packaging=TapeAndReel, Part Number=5990110007F, Part Status=Active, partid=308, price=0.04, Series=599, Size / Dimension="2.00mm L x 1.25mm W", Supplier 1=DigiKey, Viewing Angle=140°, Wavelength - Dominant=633nm
D22: library part 5990110007F, "LED RED 0805 SMD", Current - Test=20mA, Device Package="0805 (2012 Metric)", LCSC part #=C19171391, Lens Color=0.80mm, Manufacturer=Dialight, Millicandela Rating=29mcd, Supplier Device Package=0805, Supplier Part Number 1=350-4353-1-ND, Voltage - Forward (Vf) (Typ)=2.1V, Color=Red, componentlink1description=Datasheet, componentlink1url=http://www.dialightsignalsandcomponents.com/Assets/Brochures_And_Catalogs/Indication/CBI_SMD_new/Dialight_CBI_data_599-0805_Apr2018.pdf, ComponentLink2Description="DigiKey Link", ComponentLink2URL=https://www.digikey.com/en/products/detail/dialight/5990110007F/9385408, Configuration=Standard, Height (Max)=0.80mm, lastupdated="2024-06-03 8:00:07 PM", Lens Size="1.40mm x 1.25mm", Lens Style="Rectangle with Flat Top", Lifecycle Status=Active, Minimum Order=1, Mounting Type="Surface Mount", Package / Case="0805 (2012 Metric)", Packaging=TapeAndReel, Part Number=5990110007F, Part Status=Active, partid=308, price=0.04, Series=599, Size / Dimension="2.00mm L x 1.25mm W", Supplier 1=DigiKey, Viewing Angle=140°, Wavelength - Dominant=633nm
D44: "ESD, SOT-23, 0.1ÂµA, 24V, Unidir", LCSC part #=C14486, Package="SOT-23 Diotec", Check_prices=https://www.snapeda.com/parts/NUP2105L/Diotec/view-part/?ref=eda, MF="Diotec Semiconductor", MP=NUP2105L, SnapEDA_Link=https://www.snapeda.com/parts/NUP2105L/Diotec/view-part/?ref=snap
IC33: "Hall Effect Sensor Angle External Magnet, Not Included Gull Wing", LCSC part #=C499458, Package="SOIC-8 ams", Check_prices=https://www.snapeda.com/parts/AS5600-ASOT/ams/view-part/?ref=eda, MF=ams, MP=AS5600-ASOT, SnapEDA_Link=https://www.snapeda.com/parts/AS5600-ASOT/ams/view-part/?ref=snap
J11 J31: "CONN HEADER VERT 3POS 2.54MM", Current Rating (Amps)=3A, Insulation Color=Black, Manufacturer="Würth Elektronik", Material Flammability Rating="UL94 V-0", Operating Temperature="-40°C ~ 105°C", Supplier Part Number 1=732-5316-ND, componentlink1description=Datasheet, componentlink1url=https://katalog.we-online.de/em/datasheet/6130xx11121.pdf, ComponentLink2Description="DigiKey Link", ComponentLink2URL=https://www.digikey.com/en/products/detail/würth-elektronik/61300311121/4846825, Connector Type=Header, Contact Finish - Mating=Gold, Contact Length - Mating="0.236\" (6.00mm)", Contact Length - Post="0.118\" (3.00mm)", Contact Material="Copper Alloy", Contact Shape=Square, Contact Type="Male Pin", Fastening Type=Push-Pull, Insulation Height="0.100\" (2.54mm)", Insulation Material="Polyamide (PA6T), Nylon 6T", lastupdated="2024-10-18 1:43:15 PM", Lifecycle Status=Active, Minimum Order=1, Mounting Type="Through Hole", Number of Positions=3, Number of Positions Loaded=All, Number of Rows=1, Overall Contact Length="0.454\" (11.54mm)", Packaging=Bulk, Part Number=61300311121, Part Status=Active, partid=189, Pitch - Mating="0.100\" (2.54mm)", price=0.07, Row Spacing - Mating="-40°C ~ 105°C", Series=WR-PHD, Shrouding=Unshrouded, Style="Board to Board or Cable", Supplier 1=DigiKey, Termination=Solder
J21: "CONN RCPT 4POS 0.1 GOLD PCB", Current Rating (Amps)=3A, Insulation Color=Black, Manufacturer="Harwin Inc.", Material Flammability Rating="UL94 V-0", Operating Temperature="-40°C ~ 105°C", Supplier Part Number 1=952-1791-ND, componentlink1description=Datasheet, componentlink1url=https://cdn.harwin.com/pdfs/Harwin_PC_Connectors_M20.pdf, ComponentLink2Description="DigiKey Link", ComponentLink2URL=https://www.digikey.com/en/products/detail/harwin-inc/M20-7820442/3727760, Connector Type=Receptacle, Contact Finish - Mating=Gold, Contact Finish - Post=Tin, Contact Finish Thickness - Mating=Flash, Contact Length - Post="0.118\" (3.00mm)", Contact Type="Female Socket", Fastening Type=Push-Pull, Insulation Height="0.335\" (8.51mm)", lastupdated="2022-09-21 6:57:11 PM", Lifecycle Status=Active, Mated Stacking Heights="11.04mm, 12.63mm", Minimum Order=1, Mounting Type="Through Hole", Number of Positions=4, Number of Positions Loaded=All, Number of Rows=1, Packaging=Tube, Part Number=M20-7820442, Part Status=Active, Pitch - Mating="0.100\" (2.54mm)", price=0.45, Series=M20, Style="Board to Board or Cable", Supplier 1=DigiKey, Termination=Solder
J22: LCSC part #=C99176
J43: LCSC part #=C19271397, Package=None, Availability=Unavailable, MP=S4B-XH-A, price=None
J44 J54: "Connector Header Through Hole 2 position 0.098 (2.50mm)", LCSC part #=C19271386, Package=None, Check_prices=https://www.snapeda.com/parts/B2B-XH-A%20(LF)(SN)/JST+Sales+America+Inc./view-part/?ref=eda, MF="JST Sales", MP="B2B-XH-A (LF)(SN)", SnapEDA_Link=https://www.snapeda.com/parts/B2B-XH-A%20(LF)(SN)/JST+Sales+America+Inc./view-part/?ref=snap
R11 R43: library part RC0805FR-0710KL, "RES 10K OHM 1% 1/8W 0805", Device Package="0805 (2012 Metric)", LCSC part #=C84376, Manufacturer=Yageo, Operating Temperature="-55°C ~ 155°C", Power (Watts)="0.125W, 1/8W", Supplier Device Package=0805, Supplier Part Number 1=311-10.0KCRCT-ND, Temperature Coefficient=±100ppm/°C, Tolerance=±1%, componentlink1description=Datasheet, componentlink1url=https://www.yageo.com/upload/media/product/productsearch/datasheet/rchip/PYu-RC_Group_51_RoHS_L_10.pdf, ComponentLink2Description="DigiKey Link", ComponentLink2URL=https://www.digikey.com/en/products/detail/yageo/RC0805FR-0710KL/727535, ComponentLink3Description="LCSC link", ComponentLink3URL=https://www.lcsc.com/product-detail/C84376.html?s_z=n_RC0805FR-0710KL%2520, Composition="Thick Film", Features="Moisture Resistant", Height - Seated (Max)="0.024\" (0.60mm)", lastupdated="2024-07-25 9:20:18 AM", Lifecycle Status=Active, Minimum Order=1, Number of Terminations=2, Package / Case="0805 (2012 Metric)", Packaging=TapeAndReel, Part Number=RC0805FR-0710KL, Part Status=Active, partid=46046, price=0.01, Resistance="10 kOhms", Series=RC_L, Size / Dimension="0.079\" L x 0.049\" W (2.00mm x 1.25mm)", Supplier 1=DigiKey
R21 R31: library part SR0805FR-4733RL, "RES 33 OHM 1% 1/2W 0805", Device Package="0805 (2012 Metric)", LCSC part #=C6234260, Manufacturer=Yageo, Operating Temperature="-55°C ~ 155°C", Power (Watts)="0.5W, 1/2W", Ratings=AEC-Q200, Supplier Device Package=0805, Supplier Part Number 1=13-SR0805FR-4733RLCT-ND, Temperature Coefficient=±100ppm/°C, Tolerance=±1%, componentlink1description=Datasheet, componentlink1url=https://www.yageo.com/upload/media/product/app/datasheet/rchip/pyu-sr_20105_rohs_l.pdf, ComponentLink2Description="DigiKey Link", ComponentLink2URL=https://www.digikey.com/en/products/detail/yageo/SR0805FR-4733RL/17026888, Composition="Thick Film", Features="Automotive AEC-Q200, Pulse Withstanding", Height - Seated (Max)="0.024\" (0.60mm)", lastupdated="2026-04-06 8:09:11 PM", Lifecycle Status=Active, Minimum Order=1, Number of Terminations=2, Package / Case="0805 (2012 Metric)", Packaging=TapeAndReel, Part Number=SR0805FR-4733RL, partid=87401, price=0.16, Resistance="33 Ohms", Series=SR, Size / Dimension="0.079\" L x 0.049\" W (2.00mm x 1.25mm)", Supplier 1=DigiKey
R22 R41: library part ERJ-PB6B4700V, "RES SMD 470 OHM 0.1% 1/4W 0805", Device Package="0805 (2012 Metric)", LCSC part #=C441978, Manufacturer="Panasonic Electronic Components", Operating Temperature="-55°C ~ 155°C", Power (Watts)="0.25W, 1/4W", Ratings=AEC-Q200, Supplier Device Package=0805, Supplier Part Number 1=P20556CT-ND, Temperature Coefficient=±50ppm/°C, Tolerance=±0.1%, componentlink1description=Datasheet, componentlink1url=https://industrial.panasonic.com/cdbs/www-data/pdf/RDM0000/AOA0000C328.pdf, ComponentLink2Description="DigiKey Link", ComponentLink2URL=https://www.digikey.com/en/products/detail/panasonic-electronic-components/ERJ-PB6B4700V/6213339, Composition="Thick Film", Features="Automotive AEC-Q200", Height - Seated (Max)="0.028\" (0.70mm)", lastupdated="2026-04-05 8:11:23 PM", Lifecycle Status=Active, Minimum Order=1, Number of Terminations=2, Package / Case="0805 (2012 Metric)", Packaging=TapeAndReel, Part Number=ERJ-PB6B4700V, Part Status=Active, partid=28402, price=0.04, Resistance="470 Ohms", Series=ERJ-PB6, Size / Dimension="0.079\" L x 0.049\" W (2.00mm x 1.25mm)", Supplier 1=DigiKey
R33: library part SR0805JR-7W1KL, "RES 1K OHM 5% 1/4W 0805", Device Package="0805 (2012 Metric)", LCSC part #=C441981, Manufacturer=Yageo, Operating Temperature="-55°C ~ 155°C", Power (Watts)="0.25W, 1/4W", Ratings=AEC-Q200, Supplier Device Package=0805, Supplier Part Number 1=YAG6171CT-ND, Temperature Coefficient=±100ppm/°C, Tolerance=±5%, componentlink1description=Datasheet, componentlink1url=http://www.yageo.com/documents/recent/PYu-SR_20105_RoHS_L_8.pdf, ComponentLink2Description="DigiKey Link", ComponentLink2URL=https://www.digikey.com/en/products/detail/yageo/SR0805JR-7W1KL/9696409, Composition="Thick Film", Features="Automotive AEC-Q200, Pulse Withstanding", Height - Seated (Max)="0.024\" (0.60mm)", lastupdated="2026-04-05 9:18:17 PM", Lifecycle Status=Active, Minimum Order=1, Number of Terminations=2, Package / Case="0805 (2012 Metric)", Packaging=TapeAndReel, Part Number=SR0805JR-7W1KL, Part Status=Active, partid=30716, price=0.02, Resistance="1 kOhms", Series=SR, Size / Dimension="0.079\" L x 0.049\" W (2.00mm x 1.25mm)", Supplier 1=DigiKey
R44: library part ERJ-6GEYJ121V, "RES SMD 120 OHM 5% 1/8W 0805", Device Package="0805 (2012 Metric)", LCSC part #=C410053, Manufacturer="Panasonic Electronic Components", Operating Temperature="-55°C ~ 155°C", Power (Watts)="0.125W, 1/8W", Ratings=AEC-Q200, Supplier Device Package=0805, Supplier Part Number 1=P120ACT-ND, Temperature Coefficient=±200ppm/°C, Tolerance=±5%, componentlink1description=Datasheet, componentlink1url=http://industrial.panasonic.com/www-cgi/jvcr13pz.cgi?E+PZ+3+AOA0001+ERJ6GEYJ121V+7+WW, ComponentLink2Description="DigiKey Link", ComponentLink2URL=https://www.digikey.com/en/products/detail/panasonic-electronic-components/ERJ-6GEYJ121V/89685, Composition="Thick Film", Features="Automotive AEC-Q200", Height - Seated (Max)="0.028\" (0.70mm)", lastupdated="2024-02-08 9:02:29 PM", Lifecycle Status=Active, Minimum Order=1, Number of Terminations=2, Package / Case="0805 (2012 Metric)", Packaging=TapeAndReel, Part Number=ERJ-6GEYJ121V, Part Status=Active, partid=30081, price=0.01, Resistance="120 Ohms", Series=ERJ-6G, Size / Dimension="0.079\" L x 0.049\" W (2.00mm x 1.25mm)", Supplier 1=DigiKey
R53: library part TC33X-2-103E, "TRIMMER 10K OHM 0.15W J LEAD TOP", LCSC part #=C719176, Manufacturer="Bourns Inc.", Power (Watts)=0.15W, Resistive Material=Cermet, Supplier Part Number 1=TC33X-103ECT-ND, Temperature Coefficient=±250ppm/°C, Tolerance=±25%, Adjustment Type="Top Adjustment", componentlink1description=Datasheet, componentlink1url=https://www.bourns.com/docs/Product-Datasheets/TC33.pdf, ComponentLink2Description="DigiKey Link", ComponentLink2URL=https://www.digikey.com/en/products/detail/bourns-inc/TC33X-2-103E/612858, lastupdated="2024-06-03 8:01:52 PM", Lifecycle Status=Active, Minimum Order=1, Mounting Type="Surface Mount", Number of Turns=1, Packaging=TapeAndReel, Part Number=TC33X-2-103E, Part Status=Active, partid=8, price=0.11, Resistance="10 kOhms", Series="Trimpot® TC33 - Open Frame", Size / Dimension="Rectangular - 0.150\" x 0.142\" Face (3.80mm x 3.60mm)", Supplier 1=DigiKey, Termination Style="J Lead"
R63 R73: library part PE1206FRF470R12L, "RES 0.12 OHM 1% 1W 1206", Device Package="1206 (3216 Metric)", LCSC part #=C6356569, Manufacturer=Yageo, Operating Temperature="-55°C ~ 170°C", Power (Watts)=1W, Ratings=AEC-Q200, Supplier Device Package=1206, Supplier Part Number 1=13-PE1206FRF470R12LCT-ND, Temperature Coefficient=±100ppm/°C, Tolerance=±1%, componentlink1description=Datasheet, componentlink1url=https://www.yageo.com/upload/media/product/productsearch/datasheet/rchip/PYu-PE_521_RoHS_L_10.pdf, ComponentLink2Description="DigiKey Link", ComponentLink2URL=https://www.digikey.com/en/products/detail/yageo/PE1206FRF470R12L/16642038, Composition="Metal Film", Features="Automotive AEC-Q200, Current Sense", Height - Seated (Max)="0.035\" (0.89mm)", lastupdated="2024-07-25 9:21:19 AM", Lifecycle Status=Active, Minimum Order=1, Number of Terminations=2, Package / Case="1206 (3216 Metric)", Packaging=TapeAndReel, Part Number=PE1206FRF470R12L, Part Status=Active, partid=72617, price=0.09, Resistance="120 mOhms", Series=PE_L, Size / Dimension="0.126\" L x 0.063\" W (3.20mm x 1.60mm)", Supplier 1=DigiKey
R83 R93: library part RT0805BRD074K7L, "RES SMD 4.7K OHM 0.1% 1/8W 0805", Device Package="0805 (2012 Metric)", LCSC part #=C865532, Manufacturer=Yageo, Operating Temperature="-55°C ~ 155°C", Power (Watts)="0.125W, 1/8W", Supplier Device Package=0805, Supplier Part Number 1=YAG1919CT-ND, Temperature Coefficient=±25ppm/°C, Tolerance=±0.1%, componentlink1description=Datasheet, componentlink1url=https://www.yageo.com/upload/media/product/productsearch/datasheet/rchip/PYu-RT_1-to-0.01_RoHS_L_11.pdf, ComponentLink2Description="DigiKey Link", ComponentLink2URL=https://www.digikey.com/en/products/detail/yageo/RT0805BRD074K7L/1075937, Composition="Thin Film", Height - Seated (Max)="0.024\" (0.60mm)", lastupdated="2024-07-25 9:20:24 AM", Lifecycle Status=Active, Minimum Order=1, Number of Terminations=2, Package / Case="0805 (2012 Metric)", Packaging=TapeAndReel, Part Number=RT0805BRD074K7L, Part Status=Active, partid=36704, price=0.04, Resistance="4.7 kOhms", Series=RT, Size / Dimension="0.079\" L x 0.049\" W (2.00mm x 1.25mm)", Supplier 1=DigiKey
R103: library part RT0805BRD07160KL, "RES SMD 100K OHM 0.1% 1/8W 0805", Device Package="0805 (2012 Metric)", LCSC part #=C122537, Manufacturer=Yageo, Operating Temperature="-55°C ~ 155°C", Power (Watts)="0.125W, 1/8W", Resistance="160 kOhms", Supplier Device Package=0805, Supplier Part Number 1=YAG1788CT-ND, Temperature Coefficient=±25ppm/°C, Tolerance=±0.1%, componentlink1description=Datasheet, componentlink1url=https://www.yageo.com/upload/media/product/productsearch/datasheet/rchip/PYu-RT_1-to-0.01_RoHS_L_11.pdf, ComponentLink2Description="DigiKey Link", ComponentLink2URL=https://www.digikey.com/en/products/detail/yageo/RT0805BRD07160KL/1075623, ComponentLink3Description="LCSC link", ComponentLink3URL=https://www.lcsc.com/product-detail/C865212.html?s_z=n_RT0805BRD07160KL, Composition="Thin Film", Height - Seated (Max)="0.024\" (0.60mm)", lastupdated="2024-07-25 9:20:21 AM", Lifecycle Status=Active, Minimum Order=1, Number of Terminations=2, Package / Case="0805 (2012 Metric)", Packaging=TapeAndReel, Part Number=RT0805BRD07160KL, Part Status=Active, partid=40673, price=0.04, Series=RT, Size / Dimension="0.079\" L x 0.049\" W (2.00mm x 1.25mm)", Supplier 1=DigiKey
S11: "4 Position, Through Hole, 2.54 mm Pitch, Raised Piano Slide Actuator, Convex Bottom, Long Pin, DIP Switch", LCSC part #=C5123702, Package=None, Check_prices=https://www.snapeda.com/parts/DS02C-254-1L-04BE/Same+Sky/view-part/?ref=eda, MF="Same Sky", MP=DS02C-254-1L-04BE, SnapEDA_Link=https://www.snapeda.com/parts/DS02C-254-1L-04BE/Same+Sky/view-part/?ref=snap
U11: LCSC part #=C2847904
U22: "1.5-A, 20-V, low-dropout voltage regulator with reverse current & reverse voltage protection", LCSC part #=C181262, Package="SOT-223-4 Texas Instruments", Check_prices=https://www.snapeda.com/parts/TL1963A-33DCYR/Texas+Instruments/view-part/?ref=eda, MF="Texas Instruments", MP=TL1963A-33DCYR, SnapEDA_Link=https://www.snapeda.com/parts/TL1963A-33DCYR/Texas+Instruments/view-part/?ref=snap
U33: "Bipolar Motor Driver Power MOSFET Step/Direction, UART 28-QFN (5x5)", LCSC part #=C2150710, Package="VFQFN-28 Trinamic", Check_prices=https://www.snapeda.com/parts/TMC2209-LA-T/Trinamic/view-part/?ref=eda, MF="Trinamic Motion Control GmbH", MP=TMC2209-LA-T, SnapEDA_Link=https://www.snapeda.com/parts/TMC2209-LA-T/Trinamic/view-part/?ref=snap
U44: LCSC part #=C22396693

## Via types
v1: diameter 23.62, hole 11.81, Top Layer to Bottom Layer, tented both sides, 71 vias
v2: diameter 23.62, hole 11.81, Top Layer to Bottom Layer, 1 vias

## Nets (pads, with @x,y where several pads share a name; then routed paths per layer and width w, separated by ;. In a path a pad name is that pad's centre, name@x,y a point inside that pad or via, vN(x,y) a via of type N, cw(c..) or ccw(c..) an arc to the next point about the centre after c; other vN are vias at no path point)
3.3V: 42.1 C11.1 C21.1 C31.1 C33.1 C41.1 C42.2 C51.1 C83.1 C93.2 D22.1 IC33.1 IC33.2 J11.1 J21.1 J33.1 R83.1 R93.1 S11.1B S11.2B S11.3B S11.4B U11.4 U11.5 U11.6 U33.15 U44.3 U44.5 | length 4194.5
  Top Layer w11: v1(1198.2,1426.07) 1200.61,1428.49 1200.61,1465.26 1200.8,1465.44 U33.15 1259.08,1465.44 1266.83,1457.69 1267.25,1457.69 1271.1,1453.84 1336.67,1453.84 C33.1
  Top Layer w20: J11.1 862,90 1276,90 S11.4B S11.3B S11.2B S11.1B ; v1(1290.39,1629.03) 1376.03,1629.03 1593,1846 ; U44.3@1355.71,982.88 1356.15,982.44 v1@1431.56,982.44 ; v1(1432,982) 1481.12,932.88 U44.5 1577.59,932.88 U44.5@1579.81,930.66 ; J33.1 1589,1986.02 1593,1982.02 1593,1846 ; J21.1 1901.95,1771.05 1901.95,1807.05 1863,1846 1593,1846
  Top Layer w30: 42.1 451.94,178.55 459.57,170.91 459.57,166.98 548.55,78 688,78 J11.1
  Bottom Layer w20: R93.1 901.41,1023.32 926.03,998.69 949.31,998.69 v1(950,998) 1053,998 1108,1053 1108,1132.61 1142.12,1166.73 IC33.2 ; C83.1 1299.5,1190.1 1299.5,1324.77 v1(1198.2,1426.07) 1198.2,1536.84 v1(1290.39,1629.03) ; C83.1@1289,1165 1432,1022 v1(1432,982)
  Bottom Layer w30: R93.1 890.59,1023.32 849.88,1064.04 849.88,1212.96 890.59,1253.68 R83.1
5VOUT: R43.2 U33.8 | length 799
  Top Layer w11: v1(1045.71,1388) 1045.71,1391.42 1051.26,1396.97 1051.26,1427.85 U33.8 ; v1(1254.5,1315.81) 1279.31,1291 1435.2,1291 1477,1332.8 1477,1508.71 R43.2
  Bottom Layer w11: v1(1045.71,1388) 1045.82,1388 1075.41,1417.59 1152.72,1417.59 v1(1254.5,1315.81)
24V: 32.2 C32.1 C43.1 C53.2 C63.2 U33.22 U33.28 | length 917.1
  Top Layer w11: U33.28 U33.28@1051.44,1631.95 ; U33.22 1169.56,1631.21 1184.34,1646 v1(1185,1646)
  Top Layer w40: C32.1 629,1418 754.5,1292.5 C43.1
  Bottom Layer w11: v1@1184,1647 v1(1185,1646)
  Bottom Layer w30: v1(1036.6,1646.79) 1036.81,1647 v1@1184,1647
+5: 22.1 C22.1 U22.1 | length 760.3
  Top Layer w60: 22.1 289,1164 422.61,1030.39 422.61,732.31 323.85,633.55 U22.1
CAN_N: D44.2 J44.1 J54.1 R44.1 U44.6 | length 1324.5
  Top Layer w11.9: U44.6 1591.55,982.88 1605.67,997 1667.4,997 1674.38,990.03 1674.38,988.24 1691.06,971.55 R44.1 ; R44.1@1698.94,971.55 1719.39,992 1971.8,992 J54.1 2038.12,971.91 2038.12,989.12 2115,1066 2115,1400.77 2081.4,1434.37 J44.1 2008.92,1412 1868.01,1412 1845.26,1434.74 1845.26,1435.14 1839.4,1441 D44.2@1827,1441
CAN_P: D44.1 J44.2 J54.2 R44.2 U44.7 | length 1122.5
  Top Layer w11.9: U44.7 1590.79,1032.88 1605.67,1018 1668.61,1018 1691.06,1040.45 R44.2 ; R44.2@1698.94,1040.45 1715.62,1023.76 1715.62,1019.82 1723.45,1012 1979.79,1012 J54.2 2016.68,1048.89 2056.89,1048.89 2091,1083 2091,1326.34 J44.2 2050.32,1361 2020.32,1391 1864.2,1391 1839.4,1366.2 D44.1@1827,1366.2
DebugRX: J31.1 U11.32 | length 947.9
  Top Layer w11: J31.1 989,256 1112.1,379.1 v1(1112.1,629) ; v1(1111,854) 1111,928.23 1173.46,990.7 U11.32@1224.33,990.7
  Bottom Layer w11: v1(1111,854) 1111.55,853.45 1111.55,629.55 v1(1112.1,629)
DebugTX: J31.2 U11.29 | length 838.8
  Top Layer w11: J31.2 1171,253 v1(1171,629) ; v1(1168,854) 1168,908.75 1190.89,931.64 U11.29@1224.33,931.64
  Bottom Layer w11: v1(1168,854) 1169.5,852.5 1169.5,630.5 v1(1171,629)
Diagnose: U11.40 U33.11 | length 302.6
  Top Layer w11: U11.40@1110.4,1125.47 1110.4,1151.62 1110.5,1151.73 U33.11
Dir: U11.39 U33.19 | length 556.6
  Top Layer w11: U11.39 1130.07,1301.28 1241.17,1412.38 1241.17,1428.76 v1(1242,1429.58) ; U33.19 1275.4,1544.18 1280.58,1539 v1(1284,1539)
  Bottom Layer w11: v1(1242,1429.58) 1242,1475.36 1284,1517.36 v1(1284,1539)
Disable: U11.43 U33.2 | length 757.2
  Top Layer w11: v1(825,1359) 825,1488 874,1537 950,1537 976.87,1563.87 U33.2 ; v1(827,1246) 850,1223 987.13,1223 1051.32,1158.81 U11.43
  Bottom Layer w11: v1(825,1359) 826,1358 826,1247 v1(827,1246)
Encoder_Out: IC33.3 U11.11 | length 429.2
  Top Layer w11: U11.11@896,872.6 U11.11 919.82,872.6 920.42,872 v1(946,872)
  Bottom Layer w11: v1(946,872) 967,872 1135,1040 1135,1099.13 1149.39,1113.52 1185.76,1113.52 IC33.3
GND: C11.2 C21.2 C22.2 C31.2 C32.2 C33.2 C41.2 C42.1 C51.2 C53.1 C61.2 C63.1 C83.2 C93.1 D44.3 IC33.4 IC33.5 J11.3 J21.4 J22.2 J31.3 J33.2 R22.1 R41.1 R53.1 R63.1 R73.1 R103.1 U11.7 U22.2 U22.4 U33.3 U33.13 U33.18 U33.29 U44.2 U44.8 | length 1856.6
  Top Layer w11: v1(240,543) U22.2 ; v1(581,844) C11.2@581,887.84 ; R22.1 623,744.45 v1(623,788) ; C42.1 657,494.5 v1(657,533) ; v1(680,845) C31.2@680,887.84 ; C41.2@680,1101.34 v1(680,1145) ; C21.2@779,887.84 cw(c779,885.84) 781,885.84 v1(781,844) ; C51.2@779,1101.34 779,1145 cw(c780,1145) v1(780,1146) 873.58,1146 986,1033.58 v1(986,1031) ; v1(781,634) C61.2@781,681.04 ; v1(828,1734) 869.51,1734 R63.1 ; C53.1 835.52,1570.48 v1(835.52,1535.52) ; v1(844,942) 846.94,942 856.27,951.34 U11.7@896,951.34 ; C63.1 934.12,1595.12 949.71,1595.12 963.1,1608.52 v1(966.52,1608.52) ; v1(1013,1349) 1014.31,1347.69 1014.31,1320.69 v1(1042,1293) ; U33.3 1039.51,1544.18 1039.63,1544.06 ; v1(1135.81,1392.28) 1135.81,1394.09 1149.69,1407.97 1149.69,1427.85 U33.13 ; 1181.37,1524.5 U33.18 ; C33.2 1339,1518.5 v1(1339,1561) ; R73.1 1348.99,1746.34 1387.65,1785 v1(1391,1785) ; U44.2@1355.71,1032.88 1356.15,1032.44 1463.56,1032.44 v1@1464,1032 ; R103.1@1431,1477 1433,1475 v1(1433,1430) ; v1(1478,1298) 1526.06,1298 R53.1@1537.18,1309.13 ; J33.2 1509.5,1986.5 1509.5,1941.5 v1(1510,1941) ; U44.8@1566.93,1082.88 1593.56,1082.88 1616.68,1106 v1(1619,1106) ; v2(1746,1357) 1746,1360.42 1750.27,1364.68 D44.3
  Top Layer w30: C22.2 123.39,1010.39 v1(137,1024) ; R41.1 833.32,550.32 v1(834,551)
  Top Layer w60: C32.2 631.39,2106 v1(697,2106)
  Bottom Layer w11: v1(1042,1293) C93.1
  other v1: 413,512 468,513 441,548 468,582 413,583 1466,1032 1074,1481 1112,1482 1152,1483 1072,1521 1110.5,1524.5 1153,1525 1112,1565 1072,1566 1153,1566
MS1: U11.42 U33.9 | length 302.7
  Top Layer w11: U11.42 1071.02,1427.15 U33.9
MS2: U11.41 U33.10 | length 302.7
  Top Layer w11: U11.41 1090.7,1427.15 U33.10
Net22_2: 22.2 J22.1 | length 411.2
  Top Layer w60: 22.2 87.55,1198.06 207.5,1318 J22.1
Net32_1: 32.1 J22.3
Net42_2: 42.2 U22.3 | length 281.9
  Top Layer w60: U22.3 365.55,452.45 448,370 42.2
NetC43_2: C43.2 U33.6 | length 178
  Top Layer w11: C43.2@917,1358.99 984.6,1426.59 984.6,1475.57 993.97,1484.94 1013.86,1484.94 U33.6
NetC73_1: C73.1 U33.5 | length 137.1
  Top Layer w11: C73.1 927.81,1431.09 936.09,1439.37 936.09,1453.93 986.78,1504.63 1013.86,1504.63 U33.5
NetC73_2: C73.2 U33.4 | length 105.7
  Top Layer w11: C73.2 960.64,1505.9 979.24,1524.5 U33.4
NetD11_1: D11.1 U11.16 | length 323
  Top Layer w11: D11.1 1011.96,605.06 U11.16
NetD11_2: D11.2 R41.2 | length 89
  Top Layer w11: R41.2 914.13,422.55 ccw(c914.13,427.73) D11.2
NetD22_2: D22.2 R22.2 | length 79.1
  Top Layer w11: D22.2 691.34,744 R22.2
NetIC33_8: IC33.8 J33.3 | length 1614.9
  Top Layer w20: v1(770,1723) 770,1864 944,2038 1514.95,2038 1548.31,2004.64 1548.31,1987.69 J33.3
  Bottom Layer w20: v1(770,1723) 770,1558.89 976.38,1352.51 IC33.8
NetJ11_2: J11.2 R11.1 | length 130.3
  Top Layer w11: J11.2@681,183 698.66,200.66 R11.1
NetJ21_2: J21.2 R31.2 | length 251.7
  Top Layer w11: R31.2 1711.32,1658.32 J21.2
NetJ21_3: J21.3 R21.2 | length 247.9
  Top Layer w11: R21.2 1620.32,1667.32 J21.3
NetR11_2: R11.2 R21.1 U11.36 | length 1689.7
  Top Layer w11: R11.2 891,306 1054.6,469.6 v1(1054.6,629) ; v1(1054,854) 1054,931.54 1191.23,1068.78 1198.42,1068.78 1199.08,1069.44 U11.36 1249.17,1069.45 1427.36,1247.64 1542.03,1247.64 1620.32,1325.92 R21.1
  Bottom Layer w11: v1(1054.6,629) v1@1054.6,853.4
NetR31_1: R31.1 U11.35 | length 769.8
  Top Layer w11.9: U11.35 1262.02,1049.76 1376.25,1164 1573,1164 1711.32,1302.32 R31.1
NetR43_1: R43.1 R53.3 | length 95.1
  Top Layer w20: R53.3 R43.1@1524.87,1475.42
NetR53_2: R53.2 U33.17 | length 451.8
  Top Layer w8: U33.17 1208.27,1506.13 1231.7,1506.13 1235.83,1510.25 v1(1240.06,1510.25)
  Top Layer w10: v1(1293.21,1569.25) 1310.27,1586.32 1350.37,1586.32 1385,1551.69 1385,1372.72 R53.2@1409.23,1348.5
  Bottom Layer w8: v1(1240.06,1510.25) 1240.06,1531.54 1276.65,1568.13 1292.09,1568.13 v1(1293.21,1569.25)
NetR63_2: R63.2 U33.27 | length 145.8
  Top Layer w11: R63.2 1012.18,1722.31 1012.18,1710.63 1071.13,1651.68 U33.27
NetR73_2: R73.2 U33.23 | length 145.8
  Top Layer w11: U33.23 1150.06,1621.14 1150.06,1653.7 1223.01,1726.66 R73.2
NetR103_2: R103.2 U33.20 | length 272
  Top Layer w11: U33.20 1245.2,1563.87 1283.64,1602.31 1300.1,1602.31 1302.61,1604.82 1373.18,1604.82 1388.26,1589.74 1418.1,1589.74 1431.63,1576.2 R103.2
NetS11_1A: S11.1A U11.22 | length 744.8
  Top Layer w11: U11.22 1130.08,763.55 1153.64,740 1502,740 1663,579 S11.1A
NetS11_2A: S11.2A U11.21 | length 668.7
  Top Layer w11: U11.21 1110.4,756.37 1152.43,714.33 1427.67,714.33 1563,579 S11.2A
NetS11_3A: S11.3A U11.19 | length 603.9
  Top Layer w11: U11.19 1071.03,763.55 1145.92,688.67 1353.33,688.67 1463,579 S11.3A
NetS11_4A: S11.4A U11.18 | length 527.8
  Top Layer w11: U11.18 1051.34,756.37 1144.71,663 1279,663 1363,579 S11.4A
NRST: C61.1 U11.10 | length 215.2
  Top Layer w11: C61.1@781,744.34 829.83,793.17 829.83,859.56 862.55,892.27 U11.10@895.99,892.27
OA1: J43.2 U33.24 | length 287.7
  Top Layer w11: 1129.21,1674.21 1130.18,1673.23 U33.24
  Top Layer w30: 1129.21,1674.21 1129.21,1748.21 1159.71,1778.71 J43.2
OA2: J43.1 U33.21 | length 328.3
  Top Layer w20: v1(1208.93,1612.19) 1209.62,1611.5 1209.62,1593.89 1213.8,1589.71
  Bottom Layer w30: v1(1208.93,1612.19) 1258.14,1661.41 J43.1
OB1: J43.3 U33.26 | length 286.9
  Top Layer w11: U33.26 1090.82,1673.18
  Top Layer w30: J43.3 1061.29,1783.71 1090.82,1754.18 1090.82,1673.18
OB2: J43.4 U33.1 | length 327.9
  Top Layer w20: v1(1012.07,1612.19) 1012.77,1611.5 1012.77,1590.14 1014.04,1588.87
  Bottom Layer w30: J43.4 962.86,1661.41 v1(1012.07,1612.19)
RXD: U11.33 U44.4 | length 180.5
  Top Layer w11: U11.33@1224.36,1010.38 1286.62,1010.38 1302,995 1302,967 1324.5,944.5 1324.5,943.52 1335.14,932.88 U44.4@1355.71,932.88
SCL: IC33.7 R83.2 U11.45 | length 252.4
  Top Layer w11: v1(932,1190) 932.09,1190.09 980.66,1190.09 1011.95,1158.81 U11.45@1011.95,1125.37
  Bottom Layer w11: v1(932,1190) 929.17,1190 924.39,1185.22 908.22,1185.22 R83.2 902.27,1166.73 IC33.7
SDA: IC33.6 R93.2 U11.46 | length 257.3
  Top Layer w11: U11.46@992.29,1125.34 992.29,1091.9 1010.79,1073.4 v1(1040.6,1073.4)
  Bottom Layer w11: R93.2 901.41,1104 914.14,1116.73 IC33.6 993.11,1116.73 1034.03,1075.81 1038.19,1075.81 v1(1040.6,1073.4)
Step: U11.37 U33.16 | length 477.3
  Top Layer w11: U11.37 1169.44,1289.44 1274,1394 v1(1274,1415) ; U33.16 1207.14,1484.94 1266.44,1484.94 1269.82,1481.56 1279.17,1481.56 v1(1281.58,1479.15)
  Bottom Layer w11: v1(1274,1415) 1274,1418.42 1281.16,1425.57 1281.16,1478.72 v1(1281.58,1479.15)
tmcRx: R33.1 U11.14 U33.14 | length 887.9
  Top Layer w11: R33.1 972.34,772.94 972.59,773.19 972.59,969.59 v1(1034,1031) ; v1(1159,1366) 1159,1369.42 1169.56,1379.97 U33.14